# Altium PCB board_pcb.PcbDoc
Units mm, origin at the board's own origin, x right, y up, seen from the top; angles counter-clockwise.
Board outline 55 x 67 mm, 2 copper layers (Top Layer, Bottom Layer); 6 components, 8 nets, 70 pads, 0 vias.
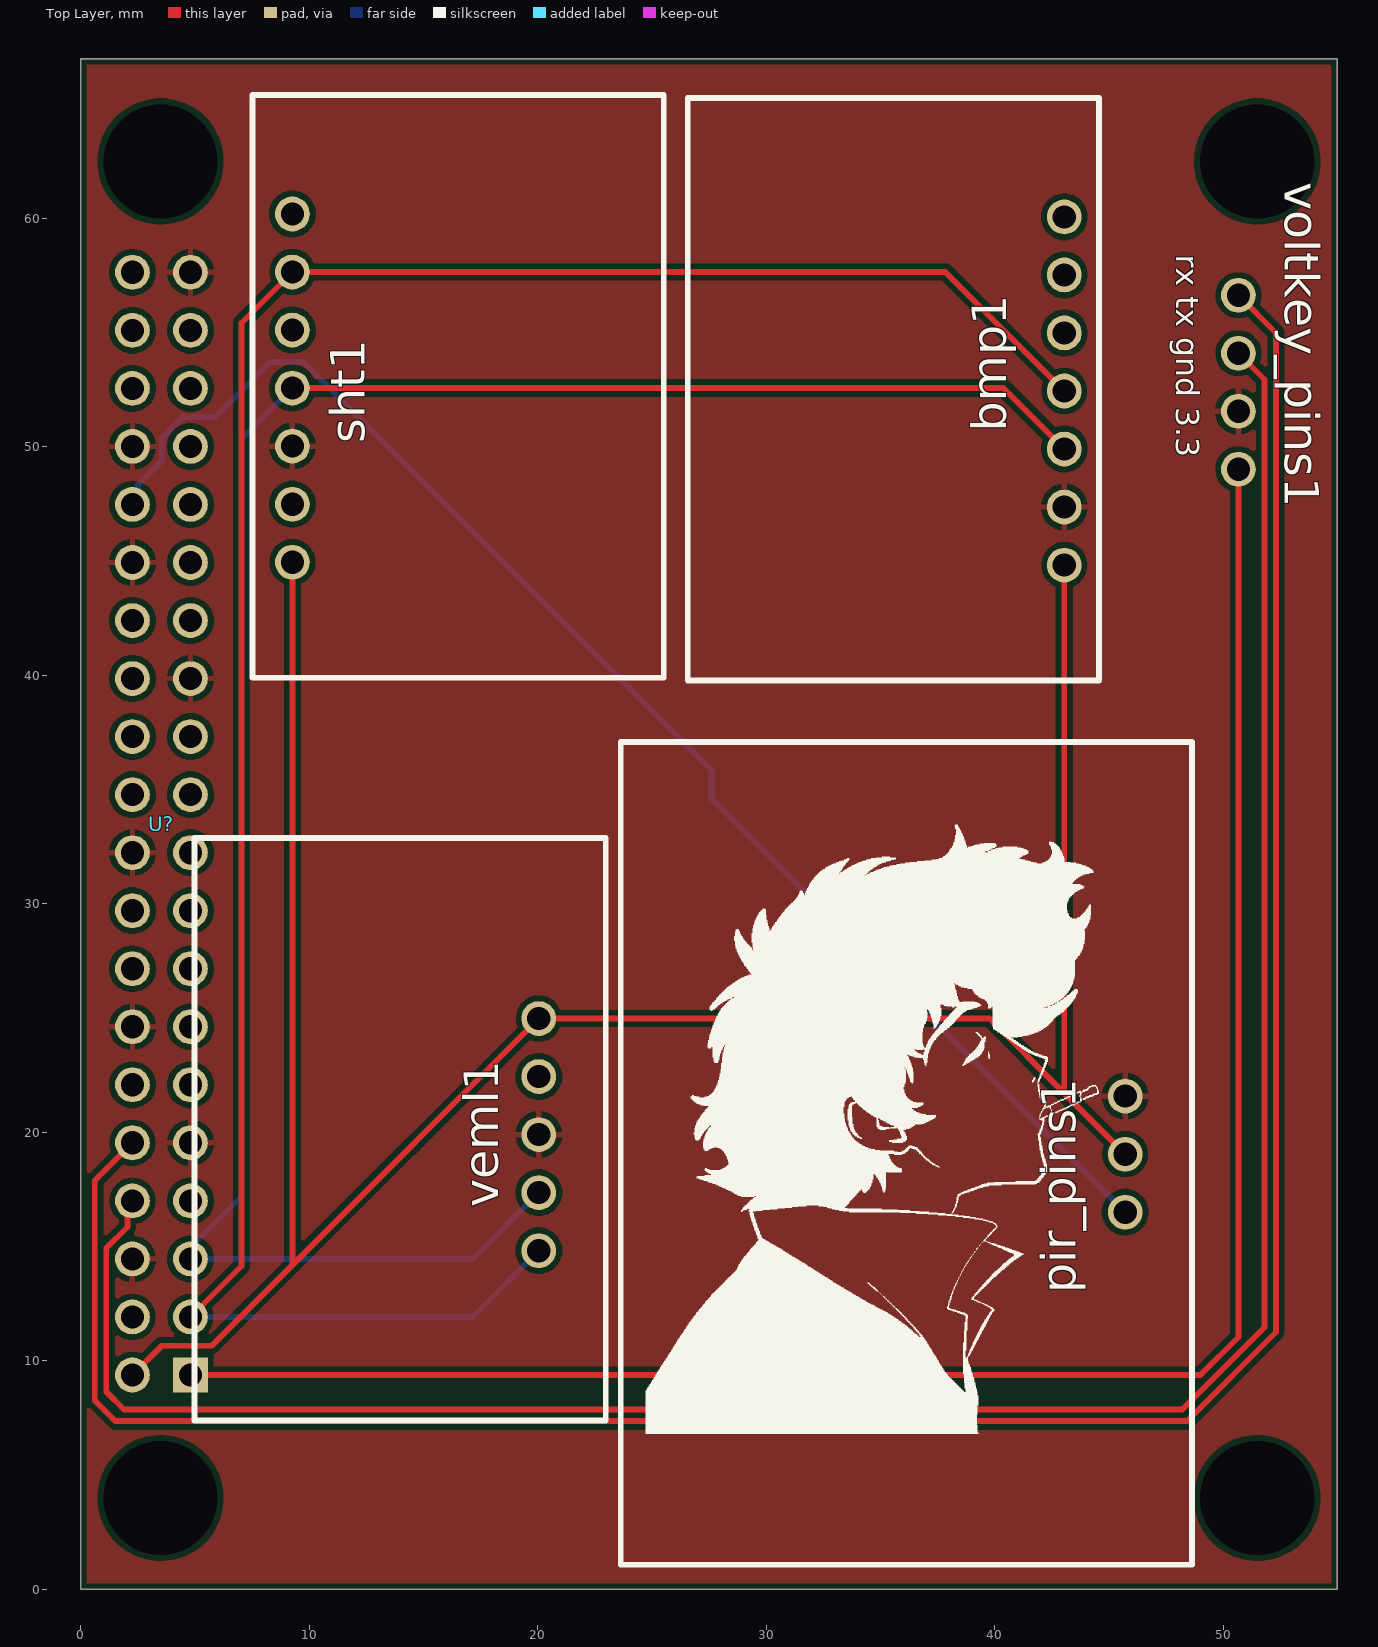
[diagram p0: Top Layer view]
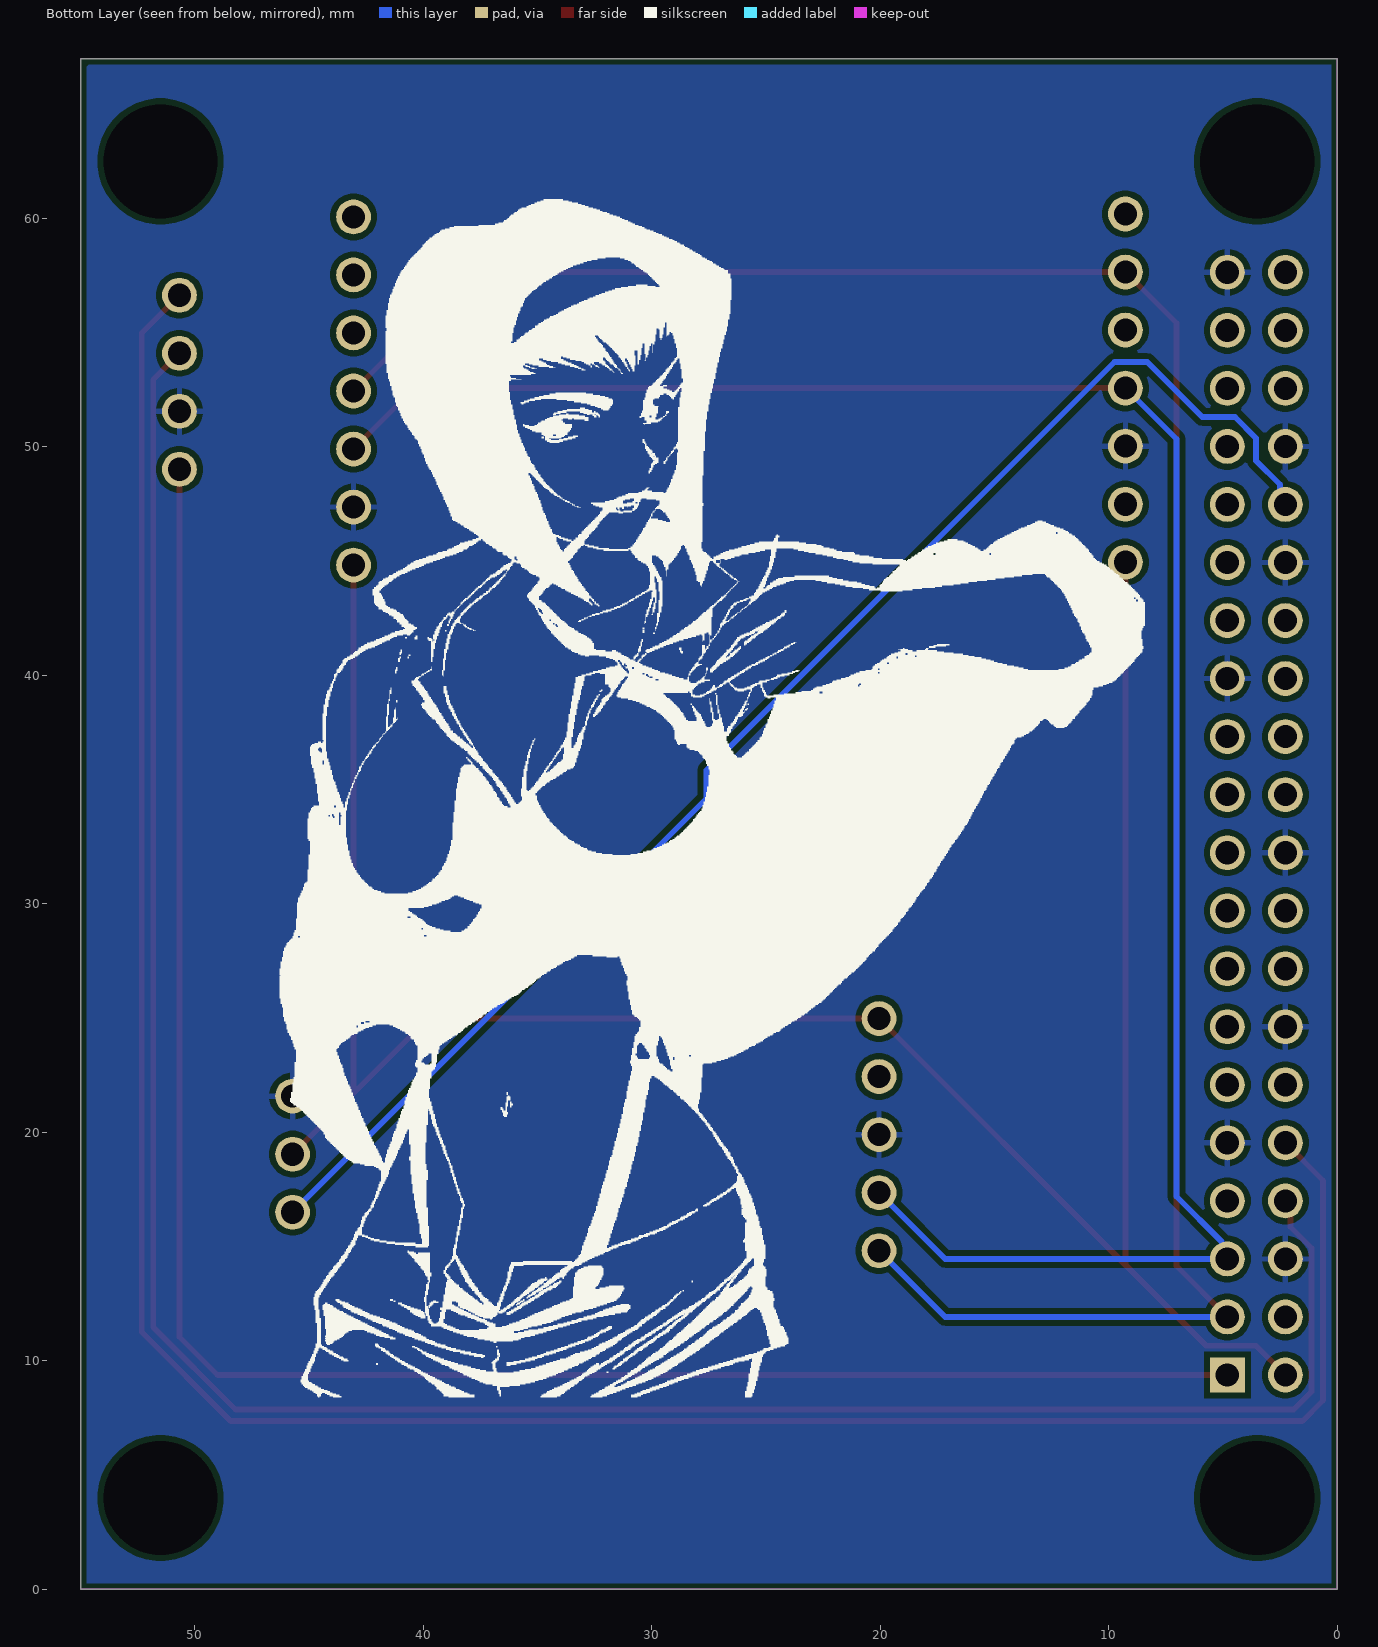
[diagram p1: Bottom Layer view, seen from below]

## Layer stack, top to bottom
Top Solder: solder mask 0.0102, Solder Resist, Dk 3.5
Top Layer: signal copper 0.0356
Dielectric 1: dielectric 0.32, FR-4, Dk 4.8
Bottom Layer: signal copper 0.0356
Bottom Solder: solder mask 0.0102, Solder Resist, Dk 3.5

## Board outline
0,0 54.991,0 55,67 0,67

## Design rules (kind name [scope] priority, off if disabled: settings)
Clearance [All] p1: gap=0.254 ignorepadtopadclearanceinfootprint=FALSE except(0: Arc-Hole Track-Hole SMDPad-Hole THPad-Hole Via-Hole Fill-Hole Poly-Hole Region-Hole Text-Hole)
PolygonConnect [All] p1: connectstyle=Relief reliefconductorwidth=0.254 reliefentries=4 polygonreliefangle="90 Angle" airgapwidth=0.254
RoutingVias [All] p1: holewidth=0.711 width=1.27 viastyle="Through Hole" minholewidth=0.711 minwidth=1.27 maxholewidth=0.711 maxwidth=1.27
SolderMaskExpansion [All] p1: expansion=0.102 istentingtop=FALSE
Width [All] p1: maxlimit=0.254 minlimit=0.254 preferedwidth=0.254
30 further rules are at their usual default settings.

## Classes and differential pairs
component class board: bmp1 pir_pins1 sht1 veml1 voltkey_pins1

## Components (designator, comment, footprint, x,y, rotation, side; value= is the part's Value field where it differs from the comment)
bmp1 "BMP280_PINOUT" bmp280_footprint 14.086,48.1 r90 top
pir_pins1 "PIR_PINOUT" pir_footprint 45.593,19.05 r270 top
sht1 "SHT31_PINOUT" sht31_footprint 44.069,43.688 r90 top
U? "RASPBERRY_PI_4B_4GB" MODULE_RASPBERRY_PI_4B_4GB 28.04,43.515 r90 top
veml1 "VEML7700_PINOUT" veml7700_footprint 20.066,19.939 r270 top
voltkey_pins1 "VOLTKEY_PINOUT" voltkey_footprint 50.673,52.832 r90 top

## Footprints (in the part's own frame and the unit in brackets; to place one, negate y for a bottom-side part, rotate by r counter-clockwise, add the part's x,y. Pads: shape width x height; smd on the part's side, far side on the other; paste and mask are expansions set on the pad)
bmp280_footprint [mil]
  round 60 hole 40: 1(-123.7,189.57) 2(-23.7,189.57) 3(76.3,189.57) 4(176.3,189.57) 5(276.3,189.57) 6(376.3,189.57) 7(476.3,189.57)
MODULE_RASPBERRY_PI_4B_4GB [mil]
  rect 60x60 / inner round 60 / far side rect 60x60 hole 40: 1(-1343.7,914.57)
  round 60 hole 40: 2(-1343.7,1014.57) 3(-1243.7,914.57) 4(-1243.7,1014.57) 5(-1143.7,914.57) 6(-1143.7,1014.57) 7(-1043.7,914.57) 8(-1043.7,1014.57) 9(-943.7,914.57) 10(-943.7,1014.57) 11(-843.7,914.57) 12(-843.7,1014.57) 13(-743.7,914.57) 14(-743.7,1014.57) 15(-643.7,914.57) 16(-643.7,1014.57) 17(-543.7,914.57) 18(-543.7,1014.57) 19(-443.7,914.57) 20(-443.7,1014.57) 21(-343.7,914.57) 22(-343.7,1014.57) 23(-243.7,914.57) 24(-243.7,1014.57) 25(-143.7,914.57) 26(-143.7,1014.57) 27(-43.7,914.57) 28(-43.7,1014.57) 29(56.3,914.57) 30(56.3,1014.57) 31(156.3,914.57) 32(156.3,1014.57) 33(256.3,914.57) 34(256.3,1014.57) 35(356.3,914.57) 36(356.3,1014.57) 37(456.3,914.57) 38(456.3,1014.57) 39(556.3,914.57) 40(556.3,1014.57)
pir_footprint [mil]
  round 60 hole 40: 1(-100,5) 2(0,5) 3(100,5)
sht31_footprint [mil]
  round 60 hole 40: 1(45,40) 2(145,40) 3(245,40) 4(345,40) 5(445,40) 6(545,40) 7(645,40)
veml7700_footprint [mil]
  round 60 hole 40: 1(-198.7,-0.43) 2(-98.7,-0.43) 3(1.3,-0.43) 4(101.3,-0.43) 5(201.3,-0.43)
voltkey_footprint [mil]
  round 60 hole 40: 1(-150,0) 2(-50,0) 3(50,0) 4(150,0)

## Part data
U?: "BCM2711 Raspberry Pi 4 Model B 4GB - ARMÂ® CortexÂ®-A72 MPU Embedded Evaluation Board", Package=None, Availability="In Stock", Check_prices=https://www.snapeda.com/parts/RASPBERRY%20PI%204B/4GB/Raspberry+Pi/view-part/?ref=eda, MF="Raspberry Pi", MP="RASPBERRY PI 4B/4GB", Price=None, Purchase-URL="https://pricing.snapeda.com/search/part/RASPBERRY PI 4B/4GB/?ref=eda", SnapEDA_Link=https://www.snapeda.com/parts/RASPBERRY%20PI%204B/4GB/Raspberry+Pi/view-part/?ref=snap

## Free pads (board coordinates)
  round 1.524 hole 5: 1(3.5,4) 2(51.5,4) 3(51.5,62.5) 4(3.5,62.5)

## Nets (pads, with @x,y where several pads share a name; then routed paths per layer and width w, separated by ;. In a path a pad name is that pad's centre, name@x,y a point inside that pad or via, vN(x,y) a via of type N, cw(c..) or ccw(c..) an arc to the next point about the centre after c; other vN are vias at no path point)
+3v3: U?.1 voltkey_pins1.1 | length 84.5
  Top Layer w0.254: U?.1 49.009,9.385 50.673,11.049 voltkey_pins1.1
+5: bmp1.1 pir_pins1.2 sht1.1 U?.2 veml1.1 | length 106.2
  Top Layer w0.254: U?.2 3.553,10.668 5.737,10.668 9.282,14.213 ; bmp1.1 9.271,14.224 9.282,14.213 ; sht1.1 43.053,21.717 ; pir_pins1.2 43.053,21.717 ; 9.282,14.213 veml1.1 39.784,24.986 43.053,21.717
GND: bmp1.3 pir_pins1.1 sht1.2 U?.6 U?.9 U?.14 U?.20 U?.25 U?.30 U?.34 U?.39 veml1.3 voltkey_pins1.2
Netbmp1_4: bmp1.4 sht1.3 U?.5 veml1.4 | length 91.3
  Top Layer w0.254: bmp1.4 40.386,52.578 sht1.3
  Bottom Layer w0.254: bmp1.4 7.04,50.347 7.04,17.2 5.053,15.213 5.053,14.708 U?.5 17.154,14.465 veml1.4
Netbmp1_6: bmp1.6 sht1.4 U?.3 veml1.5 | length 100
  Top Layer w0.254: U?.3 7.04,14.156 7.04,55.427 bmp1.6 37.846,57.658 sht1.4
  Bottom Layer w0.254: U?.3 17.154,11.925 veml1.5
Netpir_pins1_3: pir_pins1.3 U?.32 | length 63.1
  Bottom Layer w0.254: U?.32 2.508,47.723 2.508,48.355 3.552,49.399 3.552,50.383 4.476,51.308 5.904,51.308 8.317,53.721 9.744,53.721 27.611,35.855 27.611,34.619 pir_pins1.3
NetU?_8: U?.8 voltkey_pins1.3 | length 104.4
  Top Layer w0.254: U?.8 2.05,16.786 2.05,15.862 1.127,14.939 1.127,8.652 1.905,7.874 48.216,7.874 51.816,11.474 51.816,52.959 voltkey_pins1.3
NetU?_10: U?.10 voltkey_pins1.4 | length 111.7
  Top Layer w0.254: U?.10 0.619,17.894 0.619,8.271 1.524,7.366 48.427,7.366 52.324,11.263 52.324,54.991 voltkey_pins1.4
pads on no net: bmp1.2 bmp1.5 bmp1.7 sht1.5 sht1.6 sht1.7 U?.4 U?.7 U?.11 U?.12 U?.13 U?.15 U?.16 U?.17 U?.18 U?.19 U?.21 U?.22 U?.23 U?.24 U?.26 U?.27 U?.28 U?.29 U?.31 U?.33 U?.35 U?.36 U?.37 U?.38 U?.40 veml1.2

## Polygon pours and split planes (outlines as drawn)
GND on Bottom Layer "GND_L02_P001" (solid, remove dead copper, pour order 1): 0,68.326 0,0 55.499,0 55.626,0.127 55.626,68.072
GND on Top Layer "GND_L01_P000" (solid, remove dead copper, pour order 0): 0,68.326 0,0 55.499,0 55.626,0.127 55.626,68.072

## Keep-outs
Keep-Out Layer:
  the board outline again, w0.01

## Silkscreen, mask and mechanical layers (free items; w line width, h text height)
Top Overlay:
  drawing of 37 lines, arcs and shapes, not listed
  text "rx tx gnd 3.3" at 47.958,58.42 h1 r270
Bottom Overlay:
  drawing of 87 lines, arcs and shapes, not listed